# Altium PCB PCB1.PcbDoc
Units mm, origin at the board's own origin, x right, y up, seen from the top; angles counter-clockwise.
Board outline 48.26 x 96.52 mm, 2 copper layers (Top Layer, Bottom Layer), stack 1.569 mm thick; 16 components, 9 nets, 60 pads, 178 vias.
Unrouted connection lines stored in the file: 13.
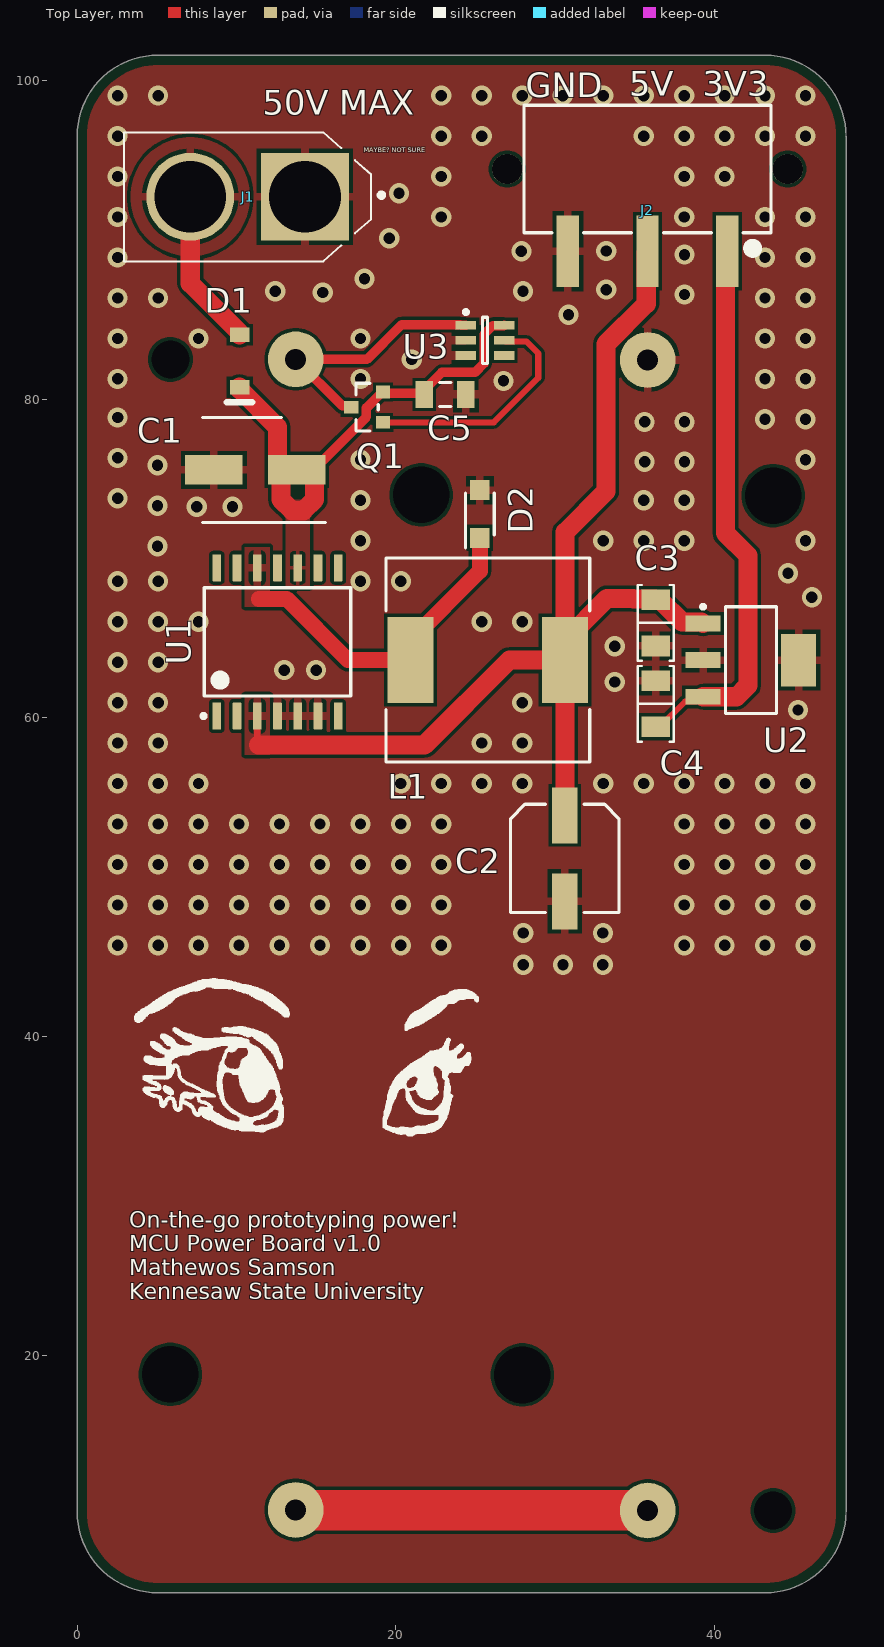
[diagram p0: Top Layer view]
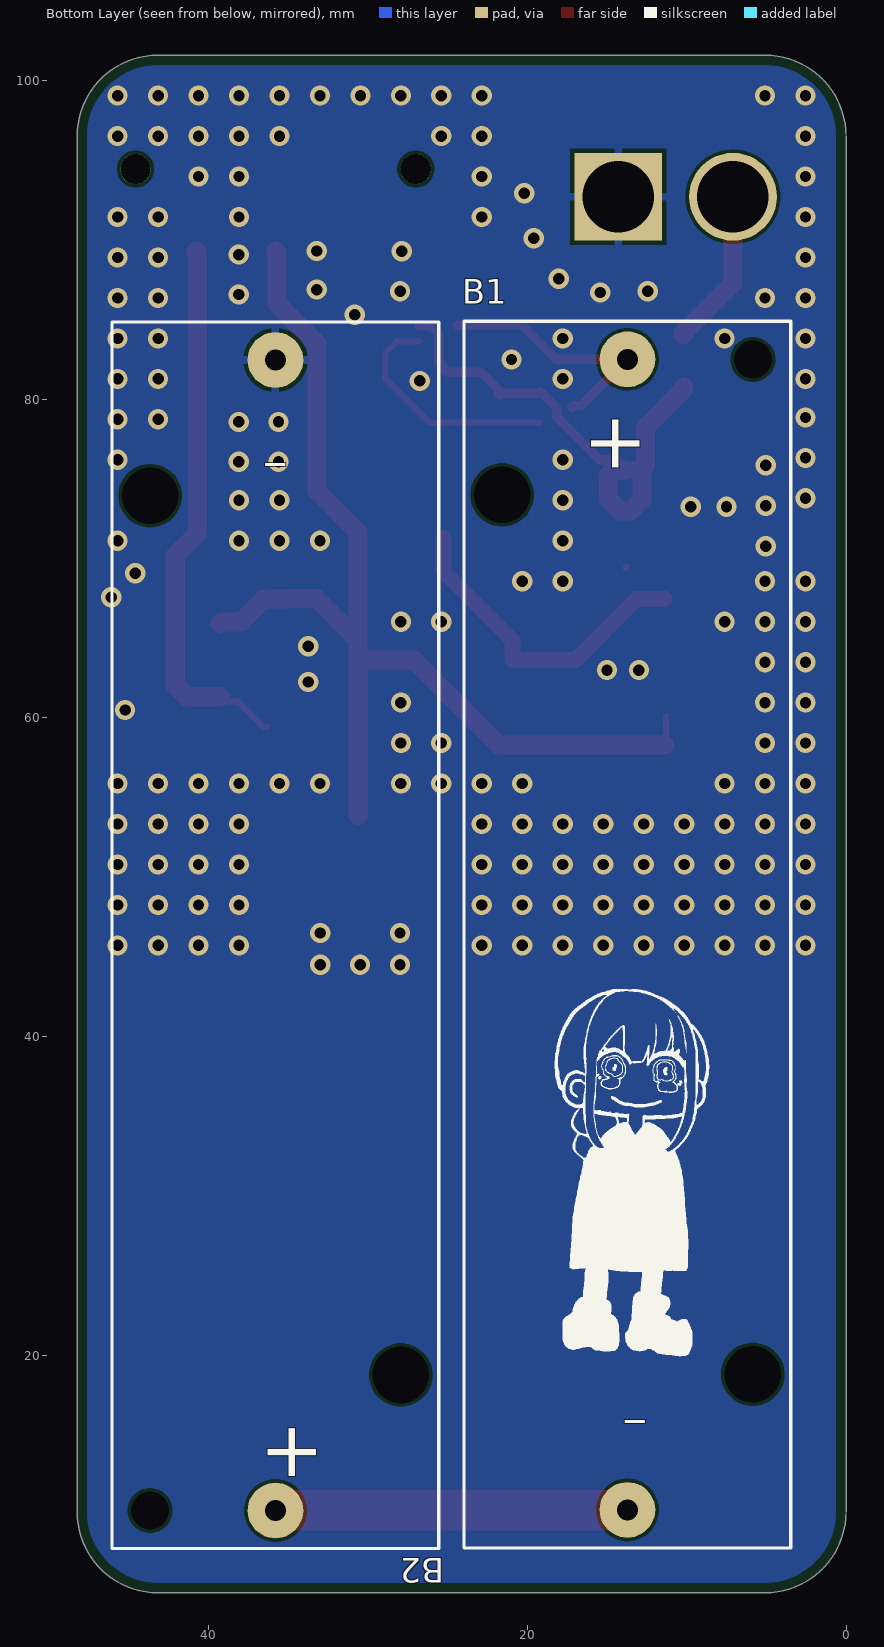
[diagram p1: Bottom Layer view, seen from below]
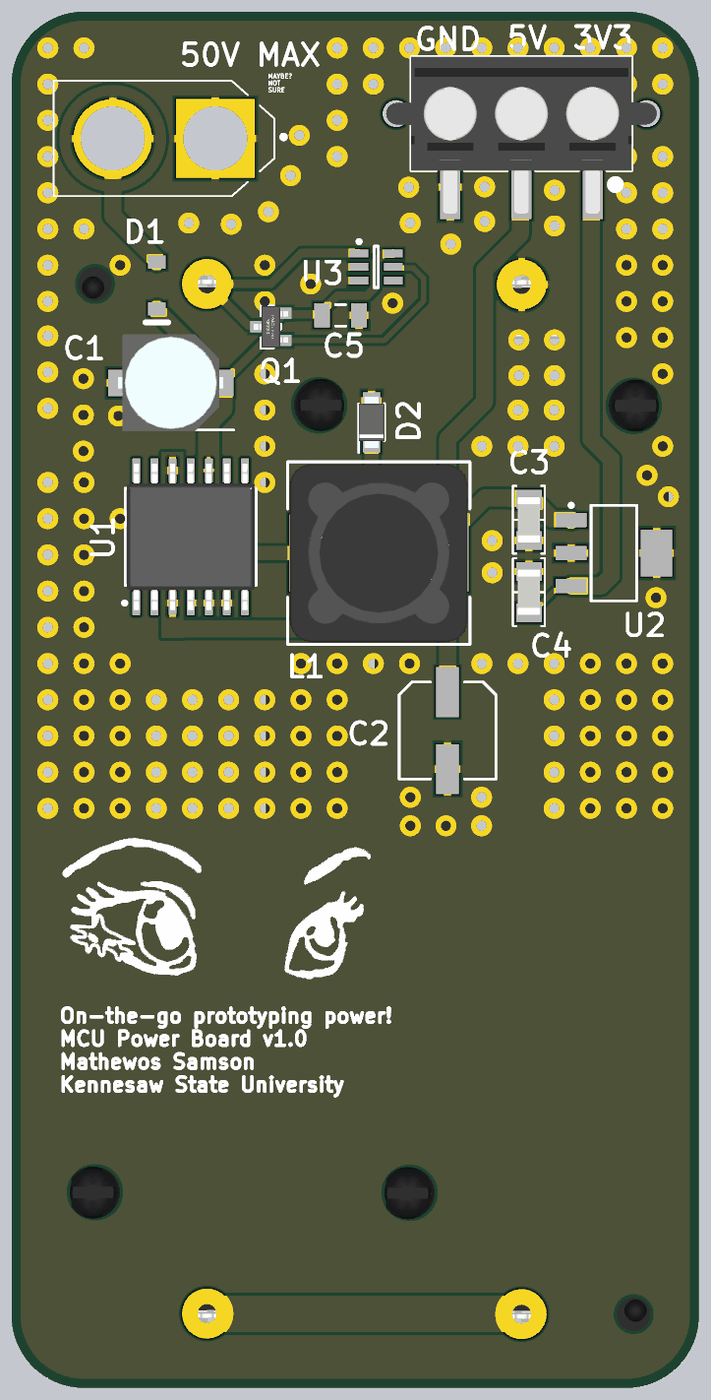
[diagram p2: 3D render of the assembled board from above, using the file's embedded part models]

## Layer stack, top to bottom
Top Solder: solder mask 0.0254, SM-001, Dk 4
Top Layer: signal copper 0.035
Dielectric 1: core 1.4986, Core-043, Dk 4.3
Bottom Layer: signal copper 0.035
Bottom Solder: solder mask 0.0254, SM-001, Dk 4

## Board outline
0,10.16 0,96.52 cw(c5.08,96.52) 5.08,101.6 43.18,101.6 cw(c43.18,96.52) 48.26,96.52 48.26,10.16 cw(c43.18,10.16) 43.18,5.08 5.08,5.08 cw(c5.08,10.16)

## Design rules (kind name [scope] priority, off if disabled: settings)
BoardOutlineClearance [All] p1: gap=0.2 ignorepadtopadclearanceinfootprint=FALSE except(0.4: Arc-SplitBarrior Arc-SplitContinuation Track-SplitBarrior Track-SplitContinuation SMDPad-SplitBarrior SMDPad-SplitContinuation THPad-SplitBarrior THPad-SplitContinuation Via-SplitBarrior Via-SplitContinuation Fill-SplitBarrior Fill-SplitContinuation Poly-SplitBarrior Poly-SplitContinuation Region-SplitBarrior Region-SplitContinuation Text-SplitBarrior Text-SplitContinuation)
Clearance "Clearance Bottom Layer" [OnLayer('Bottom Layer')] p1: gap=0.203 ignorepadtopadclearanceinfootprint=TRUE except(0.254: Arc-Text Track-Text SMDPad-Text THPad-Text Via-Text Fill-Text Poly-Text Region-Text Text-Text)
Clearance "Clearance Top Layer" [OnLayer('Top Layer')] p2: gap=0.203 ignorepadtopadclearanceinfootprint=TRUE except(0.254: Arc-Text Track-Text SMDPad-Text THPad-Text Via-Text Fill-Text Poly-Text Region-Text Text-Text)
Clearance [All] p3: gap=0.2 ignorepadtopadclearanceinfootprint=FALSE except(0.089: Arc-Arc Arc-Track Arc-SMDPad Track-Track Track-SMDPad SMDPad-SMDPad; 0.127: Arc-Via Track-Via SMDPad-Via THPad-Via Via-Via; 0.254: Arc-Text Track-Text SMDPad-Text THPad-Text Via-Text Fill-Text Poly-Text Region-Text Text-Text)
HoleSize [All] p1: absolutevalues=TRUE maxlimit=6.3 minlimit=0.2 maxpercent=80.000 minpercent=20.000
MinimumAnnularRing [All] p1: minimumring=0.076
MinimumSolderMaskSliver [All] p1: minsoldermaskwidth=0.1
PolygonConnect PolygonConnect_3 [All vs IsNamedPolygon('VIN_L01_P001')] p1: connectstyle=Relief reliefconductorwidth=0.254 reliefentries=4 polygonreliefangle="90 Angle" airgapwidth=0.2
PolygonConnect PolygonConnect_2 [All vs IsNamedPolygon('VIN_L01_P001')] p2: thpad.connectstyle=Relief thpad.reliefconductorwidth=0.254 thpad.reliefentries=4 thpad.polygonreliefangle="90 Angle" thpad.airgapwidth=0.254 smdpad.connectstyle=Relief smdpad.reliefconductorwidth=0.1 smdpad.reliefentries=4 smdpad.polygonreliefangle="90 Angle" smdpad.airgapwidth=0.254 via.connectstyle=Relief via.reliefconductorwidth=0.254 via.reliefentries=4 via.polygonreliefangle="90 Angle" via.airgapwidth=0.254
PolygonConnect [All vs IsNamedPolygon('VIN_L01_P001')] p3: connectstyle=Relief reliefconductorwidth=0.254 reliefentries=4 polygonreliefangle="90 Angle" airgapwidth=0.1
PolygonConnect PolygonConnect_1 [All] p4: thpad.connectstyle=Relief thpad.reliefconductorwidth=0.508 thpad.reliefentries=4 thpad.polygonreliefangle="90 Angle" thpad.airgapwidth=0.254 smdpad.connectstyle=Relief smdpad.reliefconductorwidth=0.508 smdpad.reliefentries=4 smdpad.polygonreliefangle="90 Angle" smdpad.airgapwidth=0.254 via.connectstyle=Direct via.reliefconductorwidth=0.508 via.reliefentries=4 via.polygonreliefangle="90 Angle" via.airgapwidth=0.254
RoutingCorners [All] p1: cornerstyle=Round minsetback=2.54 maxsetback=2.54
RoutingVias [All] p1: holewidth=0.5 width=1 viastyle="Through Hole" minholewidth=0.2 minwidth=0.45 maxholewidth=1 maxwidth=2
SilkToSilkClearance [All] p1: silktosilkclearance=0.1
SilkToSolderMaskClearance [IsPad] p1: minsilkscreentomaskgap=0.1 clearancetoexposedcopper=TRUE
SolderMaskExpansion [All] p1: expansion=0.102 istentingtop=FALSE
Width [All] p1: maxlimit=2.54 minlimit=0.089 preferedwidth=0.381
25 further rules are at their usual default settings.

## Components (designator, comment, footprint, x,y, rotation, side; value= is the part's Value field where it differs from the comment)
B1 "1043" "KEYSTONE 1043" 13.72,46.396 r90 bottom locked
B2 "1043" "KEYSTONE 1043" 35.814,46.355 r270 bottom locked
C1 "EMVH500ADA220MF80G" CAPAE660X800N 11.176,75.565 r180 top
C2 "UUD1A221MCL1GS" NIC-CAPA2-6.3X7.7_V 30.607,51.181 r270 top
C3 "4.7µF" "CAP 1206_3216 - 1.8MM" 36.322,65.966 r90 top
C4 "1µF" "CAP 1206_3216 - 1.8MM" 36.322,60.886 r270 top
C5 "C1206C105K5RACTU" CAPC3216X110X50LL20T25 23.1,80.3 r180 top
D1 "B5819W" MCC-SOD123_V 10.2,82.4 r270 top
D2 "DSS16UTR" SODFL3618X110N 25.275,72.8 r90 top
J1 "XT60-M" AMASS_XT60-M 10.699,92.71 r180 top
J2 "691709710303" 691709710303 35.8,94.45 r180 top
L1 "330µH" "BOURNS SRR1280" 25.781,63.627 r0 top
Q1 "DMP2004K-7" FP-SOT23-MFG 18.2,79.5 r180 top
U1 "LM2574HVM-5.0/NOPB" NPA0014B_L 12.573,64.77 r90 top
U2 "MCP1825S-3302E/DB" SOT-223-DB3_N 42.291,63.627 r0 top
U3 "LTC4412ES6#TRMPBF" LT-S6-6-TSOT-23_N 25.6,83.7 r0 top

## Footprints (in the part's own frame and the unit in brackets; to place one, negate y for a bottom-side part, rotate by r counter-clockwise, add the part's x,y. Pads: shape width x height; smd on the part's side, far side on the other; paste and mask are expansions set on the pad)
691709710303 [mm] "Horizontal Entry SMT with Pressure Clamp, pitch 5mm, 03p"
  rect 1.4x4.5 smd: 1(-5,5.15) 2(0,5.15) 3(5,5.15)
  round 1.9 hole 1.9 unplated: M1(-8.8,0) M2(8.8,0)
  silkscreen extent -7.75,-4 7.75,5.17, body extent -9.5,-4 9.5,7, height 9.95
AMASS_XT60-M [mm]
  rect 5.516x5.516 hole 4.5: 1(-3.6,0)
  round 5.516 hole 4.5: 2(3.6,0)
  silkscreen extent -8.55,-4.05 7.75,4.05
"BOURNS SRR1280" [mm] "Precision Wire Wound Inductor, 2-Leads, Body 12.50x12.50mm, IPC Medium Density"
  rect 2.9x5.4 smd: 1(-4.85,0) 2(4.85,0)
  silkscreen extent -6.4,-6.4 6.4,6.4, body extent -6.25,-6.25 6.25,6.25, height 7.9
"CAP 1206_3216 - 1.8MM" [mm] "Chip Capacitor, 2-Leads, Body 3.25x1.60mm, IPC Medium Density"
  rect 1.3x1.8 smd: 1(-1.45,0) 2(1.45,0)
  silkscreen extent -2.37,-1.12 2.37,1.12, body extent -1.6,-0.8 1.6,0.8, height 1.8
CAPAE660X800N [mm]
  rect 3.6x1.85 smd: 1(-2.6,0) 2(2.6,0)
  silkscreen extent -4.4,-3.3 3.3,3.3, body extent -3.7,-3.4 3.7,3.4, height 8
CAPC3216X110X50LL20T25 [mm] "Chip Capacitor, 2-Leads, Body 3.20x1.60mm, IPC High Density"
  rect 1.1x1.7 smd: 1(-1.3,0) 2(1.3,0)
  silkscreen extent -0.35,-0.75 0.35,0.75, body extent -1.7,-0.9 1.7,0.9, height 1.1
FP-SOT23-MFG [mm]
  rect 0.9x0.8 smd paste+0 mask+0: 1(-1,0.95) 2(-1,-0.95) 3(1,0)
  silkscreen extent -0.7,-1.5 0.7,1.5, body extent -1.55,-1.6 1.55,1.6, height 0.25
"KEYSTONE 1043" [mm]
  round 3.5 hole 1.32: 1(36.11,0) 2(-36.11,0)
  rect 0x0 hole 3.55 unplated: M(-27.6,-7.87) M(27.6,7.87)
  rect 0x0 hole 2.39 unplated: M(36.11,-7.87)
  silkscreen extent -38.5,-10.25 38.5,10.25, body extent -38.53,-10.32 38.53,10.33, height 14.86
LT-S6-6-TSOT-23_N [mm] "SOT23, 6-Leads, Body 2.9x1.75mm, Pitch 0.95mm, IPC Medium Density"
  rect 1.3x0.55 smd: 1(-1.2,0.95) 2(-1.2,0) 3(-1.2,-0.95) 4(1.2,-0.95) 5(1.2,0) 6(1.2,0.95)
  silkscreen extent -1.32,-1.45 0.15,1.9, body extent -0.87,-1.45 0.87,1.45, height 1
MCC-SOD123_V [mil] "SOD123, 2-Leads, Body 2.7x1.6mm, Height 1.35mm"
  rect 35.98x47.99 smd: 1(-64.5,0) 2(64.5,0)
  silkscreen extent 102,-31 102,31, body extent -53,-31 53,31, height 53
NIC-CAPA2-6.3X7.7_V [mm] "Aluminum Electrolytic Capacitor, Diameter 6.3mm, Height 8mm, Pitch 5.4mm"
  rect 3.5x1.6 smd: 1(-2.7,0) 2(2.7,0)
  silkscreen extent -3.4,-3.4 3.4,3.4, body extent -3.14,-3.12 3.14,3.15, height 8
NPA0014B_L [mm] "SOIC, 14-Leads, Body 9.2x7.6mm, Pitch 1.27mm, IPC High Density"
  rrect18% 1.7x0.55 smd: 1(-4.65,3.81) 2(-4.65,2.54) 3(-4.65,1.27) 4(-4.65,0) 5(-4.65,-1.27) 6(-4.65,-2.54) 7(-4.65,-3.81) 8(4.65,-3.81) 9(4.65,-2.54) 10(4.65,-1.27) 11(4.65,0) 12(4.65,1.27) 13(4.65,2.54) 14(4.65,3.81)
  silkscreen extent -4.77,-4.6 3.4,4.76, body extent -5.14,-4.5 5.14,4.5, height 2.44
SODFL3618X110N [mm]
  rect 1.24x1.22 smd: 1(-1.5,0) 2(1.5,0)
  silkscreen extent -2.12,-0.9 1.3,0.9, body extent -1.8,-0.9 1.8,0.9, height 1.1
SOT-223-DB3_N [mm] "SOT223, 4-Leads, Body 6.5x3.5mm, Pitch 2.3mm, Lead Span 7mm, IPC Medium Density"
  rect 2.2x1 smd: 1(-3,2.3) 2(-3,0) 3(-3,-2.3)
  rect 2.2x3.3 smd: 4(3,0)
  silkscreen extent -3.12,-3.35 1.6,3.47, body extent -1.85,-3.35 1.85,3.35, height 1.8

## Part data
B1 B2: "BATTERY HOLDER 18650 PC PIN", Manufacturer="Keystone Electronics", Operating Temperature="-50°C ~ 145°C", Supplier Part Number 1=36-1043-ND, Battery Cell Size=18650, Battery Type, Function="Cylindrical, Holder", ComponentLink1Description=Datasheet, ComponentLink1URL=http://keyelco.com/userAssets/file/M65p27.pdf, ComponentLink2Description="DigiKey Link", ComponentLink2URL=http://digikey.com/product-detail/en/keystone-electronics/1043/36-1043-ND/2745669, Height Above Board="0.585\" (14.86mm)", LastUpdated="2/2/2020 9:19:56 AM", Lifecycle Status=Active, Minimum Order=1, Mounting Type="PCB, Through Hole", Number of Cells=1, Packaging=Unknown, Part Number=1043, Part Status=Active, PartId=2, Price=2.58, Series=-, Style="Holder (Open)", Supplier 1=DigiKey, Termination Style="PC Pin"
C1: "Capacitor Polarised", Manufacturer_Name="United Chemi-Con", Mouser Part Number=661-MVH50V220M, Arrow Part Number=EMVH500ADA220MF80G, Arrow Price/Stock=https://www.arrow.com/en/products/emvh500ada220mf80g/united-chemi-con, Datasheet Link=https://eu.mouser.com/datasheet/2/420/MVHRA_e-2509159.pdf, Height=8mm, Manufacturer_Part_Number=EMVH500ADA220MF80G, Mouser Price/Stock=https://www.mouser.co.uk/ProductDetail/United-Chemi-Con/EMVH500ADA220MF80G?qs=P6%252BCbgEIsoMIfZ3czqY2Bw%3D%3D
C2: library part CMP-0687-00055-1, "Aluminum Electrolytic Capacitor, UD Series, Low Impedance, 220 uF, 10 V, + / - 20%, -55 to 105 degC, Chip Type, 6.3 x 7.7 mm D x L, Pb-Free, Reel", Manufacturer=Nichicon, Rated Capacitance="220 uF", Rated Ripple Current (at 100kHz)="280 mA", Rated Voltage="10 V", Tolerance Rated Capacitance="-20 to 20%", ComponentLink1Description="Manufacturer URL", ComponentLink1URL=http://www.nichicon.co.jp/, ComponentLink2Description=Datasheet, ComponentLink2URL=http://products.nichicon.co.jp/en/pdf/XJA043/e-ud.pdf, ComponentLink3Description="Package Specification", ComponentLink3URL=http://products.nichicon.co.jp/en/pdf/XJA043/e-ud.pdf, DatasheetVersion=08/2012, Diameter="6.3 mm", Endurance Time="2000 h", Impedance="0.34 Ohm", Length="7.7 mm", Mounting Technology="Surface Mount", PackageDescription="2-Pin Surface Mount Device, Diameter 6.3 mm, Height 7.7 mm, Pitch 5.4 mm", PackageReference=CAPAE-D6.3H7.7, Packing="Dia382mm Reel", PartNumber=UUD1A221MCL1GS, RoHS=TRUE
C3: library part CM316X5R475K25AT, "CAP CER 4.7UF 25V X5R 1206", Device Package="1206 (3216 Metric)", Manufacturer="Kyocera International Inc. Electronic Components", Operating Temperature="-55°C ~ 85°C", Supplier Part Number 1=1253-2080-1-ND, Temperature Coefficient=X5R, Tolerance=±10%, Voltage - Rated=25V, Applications="General Purpose", Capacitance=4.7µF, ComponentLink1Description=Datasheet, ComponentLink1URL=https://global.kyocera.com/prdct/electro/product/pdf/cm_e.pdf, ComponentLink2Description="DigiKey Link", ComponentLink2URL=http://digikey.com/product-detail/en/kyocera-international-inc-electronic-components/CM316X5R475K25AT/1253-2080-1-ND/10197176, LastUpdated="9/2/2020 1:05:31 AM", Lifecycle Status=Active, Minimum Order=1, Mounting Type="Surface Mount, MLCC", Package / Case="1206 (3216 Metric)", Packaging=TapeAndReel, Part Number=CM316X5R475K25AT, Part Status=Active, PartId=21915, Price=0.09, Series=CM, Size / Dimension="0.126\" L x 0.063\" W (3.20mm x 1.60mm)", Supplier 1=DigiKey, Thickness (Max)="0.069\" (1.75mm)"
C4: library part CM316X5R475K25AT, "CAP CER 4.7UF 25V X5R 1206", Capacitance=4.7µF, Device Package="1206 (3216 Metric)", Manufacturer="Kyocera International Inc. Electronic Components", Operating Temperature="-55°C ~ 85°C", Supplier Part Number 1=1253-2080-1-ND, Temperature Coefficient=X5R, Tolerance=±10%, Voltage - Rated=25V, Applications="General Purpose", ComponentLink1Description=Datasheet, ComponentLink1URL=https://global.kyocera.com/prdct/electro/product/pdf/cm_e.pdf, ComponentLink2Description="DigiKey Link", ComponentLink2URL=http://digikey.com/product-detail/en/kyocera-international-inc-electronic-components/CM316X5R475K25AT/1253-2080-1-ND/10197176, LastUpdated="9/2/2020 1:05:31 AM", Lifecycle Status=Active, Minimum Order=1, Mounting Type="Surface Mount, MLCC", Package / Case="1206 (3216 Metric)", Packaging=TapeAndReel, Part Number=CM316X5R475K25AT, Part Status=Active, PartId=21915, Price=0.09, Series=CM, Size / Dimension="0.126\" L x 0.063\" W (3.20mm x 1.60mm)", Supplier 1=DigiKey, Thickness (Max)="0.069\" (1.75mm)"
C5: library part CMP-2000-06011-1, "Chip Capacitor, 1 uF, +/- 10%, 50 V, -55 to 125 degC, 1206 (3216 Metric), RoHS, Tape and Reel", Capacitance=1uF, Capacitance - nF=1000nF, Case Code - in=1206, Case Code - mm=3216, Case Height=1mm, Case Length=3.2mm, Case Width=1.6mm, Dielectric=X7R, Manufacturer=Kemet, Maximum Operating Temperature=+125C, Minimum Operating Temperature=-55C, Operating Temperature Range=-55Cto+125C, Package / Case=1206(3216metric), Package Description="2-Pin Surface Mount Device, Body 3.2 x 1.6 mm", Temperature Coefficient / Code=+/-15%, Tolerance=10%, Voltage Rating=50V, Brand=Kemet, Class=Class1, Datasheet URL=http://www.kemet.com/docfinder?Partnumber=C1206C105K5RACTU, Datasheet Version=02/2016, Dimensions=1.6mmWx3.2mmLx1mmH, Factory Pack Quantity=2500, Manufacturer URL=http://www.kemet.com/, Mounting Technology=SurfaceMount, Package Reference=1206, Packaging=Reel, Product=GeneralTypeMLCCs, Product Category=MultilayerCeramicCapacitorsMLCC-SMD/SMT, RoHS=Details, Series=C1206C, Termination Style=SMD/SMT, Type=SMDMLCCX7R6.3-250VDCCommericalGrade, Voltage Rating DC=50V
D1: library part CMP-004-00005-2, "Schottky Barrier Rectifier, 40 V, 1 A, -65 to 125 degC, 2-Pin SOD123, RoHS, Tape and Reel", Case/Package=SOD123, Manufacturer="Micro Commercial Components", Package Description="2-Pin Small Outline Diode, Body 2.7 x 1.6 mm, Height 1.35 mm", Datasheet URL=http://www.mccsemi.com/up_pdf/B5817W-B5819W(SOD-123).pdf, Datasheet Version="Rev. B, 01/2013", Manufacturer URL=http://www.mccsemi.com/, Mounting Technology=SM, Package Reference=SOD123, Package URL=http://www.mccsemi.com/up_pdf/1N4448W(SOD-123).pdf, RoHS Compliant=Unknown
D2: "Schottky Diode", Manufacturer_Name="SMC Diode Solutions", Datasheet Link=http://www.smc-diodes.com/propdf/DSS12U%20THRU%20DSS125U%20N1873%20REV.A.pdf, Height=1.1mm, Manufacturer_Part_Number=DSS16UTR
J1: "Plug; DC supply; XT60; male; PIN: 2; for cable; soldered; 30A; 500V", Package="Package Analog Devices", Availability=Unavailable, MF=AMASS, MP=XT60-M, Price=None, SnapEDA_Link=https://www.snapeda.com/parts/XT60-M/AMASS/view-part/2883912/?ref=snap
J2: library part CMP-1502-03336-1, "Serie 7097 - 5.00 mm Horizontal Entry SMT with Pressure Clamp WR-TBL, 3 pin", Manufacturer="Wurth Elektronik", Operating Temperature=-45to130degC, Datasheet URL=http://katalog.we-online.de/em/datasheet/6917097103xx.pdf, Manufacturer URL=http://www.we-online.de, Mounting Technology=SMT, Package Reference=691709710303, Packaging=TapeandReelwithCap, Part Number=691709710303, Pin Number=3, Pitch=5.00mm, Publisher=WurthElektronik
L1: library part SRR1280-331K, "FIXED IND 330UH 1.1A 600MOHM SMD", Current - Saturation=1.4A, Current Rating (Amps)=1.1A, DC Resistance (DCR)="600mOhm Max", Device Package=Nonstandard, Frequency - Self Resonant=2.9MHz, Inductance Frequency - Test=100kHz, Manufacturer="Bourns Inc.", Operating Temperature="-40°C ~ 125°C", Q @ Freq="18 @ 796kHz", Supplier Part Number 1=SRR1280-331KLCT-ND, Tolerance=±10%, ComponentLink1Description=Datasheet, ComponentLink1URL=https://www.bourns.com/docs/Product-Datasheets/SRR1280.pdf, ComponentLink2Description="DigiKey Link", ComponentLink2URL=http://digikey.com/product-detail/en/bourns-inc/SRR1280-331K/SRR1280-331KLCT-ND/2127441, Height - Seated (Max)="0.315\" (8.00mm)", Inductance=330µH, LastUpdated="9/2/2020 1:22:09 AM", Lifecycle Status=Active, Material - Core=Ferrite, Minimum Order=1, Mounting Type="Surface Mount", Package / Case=Nonstandard, Packaging=TapeAndReel, Part Number=SRR1280-331K, Part Status=Active, PartId=35, Price=0.65, Series=SRR1280, Shielding=Shielded, Size / Dimension="0.492\" L x 0.492\" W (12.50mm x 12.50mm)", Supplier 1=DigiKey, Type=Wirewound
Q1: library part CMP-12801-000029-1, "MOSFET P-CH 20V 600MA SOT23-3", Continuous Drain Current=-600mA, Drain To Source Breakdown Voltage=-20V, Drain To Source Resistance=1.1Ω, Gate To Source Voltage=8V, Input Capacitace At Vds="175pF @ -16V", Manufacturer="Diodes Inc.", Max Forward Diode Voltage=-1.2V, Max Junction Temp=+150°C, Package=SOT23, Power Dissipation=550mW, Pulse Drain Current=-1.9A, Temperature="-55°C to +150°C", Temperature Range Low=-55°C, Automotive=No, Category=Trans, ComponentLink2Description=Datasheet, ComponentLink2URL=https://www.diodes.com/assets/Datasheets/ds30933.pdf, Depletion Mode=False, Device Class L1="Discrete Semiconductors", Device Class L2=Transistors, Device Class L3=MOSFETs, Digikey Description="MOSFET P-CH 20V 600MA SOT23-3", Drain To Source Voltage=-20V, Footprint Url=https://www.diodes.com/assets/Package-Files/SOT23.pdf, Height=1.1mm, Lead Free=Yes, Manufacturer Part Number=DMP2004K-7, Mouser Description="MOSFET P-Channel", Number Of Channels=1, Number Of P Channels=1, Octopart=https://octopart.com/dmp2004k-7-diodes+inc.-7151877, RoHS=TRUE, Rthja Max=227°C/W, Standoff Height=0.013mm, Temperature Range High=+150°C, Threshold Vgs Max=-1V, Threshold Vgs Min=-0.5V, Turn Off Delay Time=20.2ns, Turn On Delay Time=8.5ns
U1: library part CMP-0069-00789-3, "SIMPLE SWITCHER® 0.5A Step-Down Voltage Regulator, 14-pin Wide SOIC, Pb-Free", Manufacturer="Texas Instruments", PackageTopMarking="NSUZXYTTE#*LM2574HVM*-5.0 P+", PowerWise=N, Code_IPC=SOIC127P1030-14, Code_JEDEC=MS-013-AF, ComponentLink1Description="Datasheet URL", ComponentLink1URL=http://www.ti.com/general/docs/lit/getliterature.tsp?genericPartNumber=LM2574HV&fileType=pdf, CompType=Switcher, PackageDescription="Molded Package, S.O., .300in Wide, 14 Lead", PackageReference=NPA0014B, PinCount=14, RoHS=Y
U2: library part CMP-0136-00458-1, "500 mA, Low Voltage, Low Quiescent Current LDO Regulator, 3-Pin SOT-223, Extended Temperature", DatasheetVersion="revB, Feb-2008", PackageDescription="3-Lead Plastic Small Outline Transistor (DB) [SOT-223]", PackageReference=SOT-223-DB3, PackageVersion="revBB, Aug-2009"
U3: library part CMP-0479-00425-1, "Low Loss PowerPath(TM) Controller, 2.5 to 28 V Vin, 6-pin SOT23 (S6-6), -40 to 85 degC, Pb-Free, Mini Tape and Reel", Manufacturer="Linear Technology", Code_JEDEC=MO-193, ComponentLink1Description="Manufacturer URL", ComponentLink1URL=http://www.linear.com/, ComponentLink2Description=Datasheet, ComponentLink2URL=http://cds.linear.com/docs/en/datasheet/4412fa.pdf, ComponentLink3Description="Package Specification", ComponentLink3URL=http://cds.linear.com/docs/en/packaging/SOT_6_05-08-1636.pdf, Ideal Diode="Single, External, P-Channel", Mounting Technology="Surface Mount", PackageDescription="6-Pin Plastic TSOT-23, Body 2.9 x 1.63 mm, Pitch 0.95 mm", PackageReference=S6-6, PackageVersion=Jun-10, Packing="Mini Tape and Reel", PartNumber=LTC4412ES6#TRMPBF, RoHS=TRUE

## Via types
v1: diameter 1.27, hole 0.711, Top Layer to Bottom Layer, 178 vias

## Nets (pads, with @x,y where several pads share a name; then routed paths per layer and width w, separated by ;. In a path a pad name is that pad's centre, name@x,y a point inside that pad or via, vN(x,y) a via of type N, cw(c..) or ccw(c..) an arc to the next point about the centre after c; other vN are vias at no path point)
+2S: B1.1 Q1.3 U3.1 | length 16.3
  Top Layer w0.6: Q1.3 17.1,79.6 16.626,79.6 B1.1 18.19,82.506 20.362,84.678 24.047,84.678 24.075,84.65 U3.1
+3V3: C4.2 J2.1 U2.3 | length 34.7
  Top Layer w0.381: C4.2 36.572,59.436 38.153,61.017 38.981,61.017 U2.3
  Top Layer w1.2: U2.3 41.397,61.327 42.1,62.03 42.1,70.2 40.7,71.6 40.7,89.2 J2.1
+5V: C2.1 C3.2 J2.2 L1.2 U1.3 U2.1 | length 71.3
  Top Layer w0.381: U1.3 11.303,58.397 11.4,58.3
  Top Layer w1.2: 11.4,58.3 21.8,58.3 27.127,63.627 L1.2 ; C2.1 30.619,53.893 30.619,63.615 L1.2 ; J2.2 35.719,89.219 35.719,85.988 33.2,83.469 33.2,74.223 30.631,71.654 L1.2@30.631,64.877 ; U2.1 39.191,66.027 37.961,66.027 36.572,67.416 C3.2 36.272,67.466 34.934,67.466 34.9,67.5 33.254,67.5 L1.2@30.631,64.877 ; L1.2 L1.2@30.631,64.877
GATE: Q1.1 U3.5 | length 14.9
  Top Layer w0.381: Q1.1 26.15,78.55 28.942,81.342 28.942,82.883 28.21,83.615 26.885,83.615 U3.5
GND: B2.2 C1.2 C2.2 C3.1 C4.1 C5.1 D2.2 J1.1 J2.3 U1.4 U1.5 U1.6 U2.2 U2.4 U3.2 U3.3
  other v1: 28,44.5 30.5,44.5 33,44.5 2.54,45.72 5.08,45.72 7.62,45.72 10.16,45.72 12.7,45.72 15.24,45.72 17.78,45.72 20.32,45.72 22.86,45.72 38.1,45.72 40.64,45.72 43.18,45.72 45.72,45.72 28,46.5 33,46.5 2.54,48.26 5.08,48.26 7.62,48.26 10.16,48.26 12.7,48.26 15.24,48.26 17.78,48.26 20.32,48.26 22.86,48.26 38.1,48.26 40.64,48.26 43.18,48.26 45.72,48.26 2.54,50.8 5.08,50.8 7.62,50.8 10.16,50.8 12.7,50.8 15.24,50.8 17.78,50.8 20.32,50.8 22.86,50.8 38.1,50.8 40.64,50.8 43.18,50.8 45.72,50.8 2.54,53.34 5.08,53.34 7.62,53.34 10.16,53.34 12.7,53.34 15.24,53.34 17.78,53.34 20.32,53.34 22.86,53.34 38.1,53.34 40.64,53.34 43.18,53.34 45.72,53.34 2.54,55.88 5.08,55.88 7.62,55.88 20.32,55.88 22.86,55.88 25.4,55.88 27.94,55.88 33.02,55.88 35.56,55.88 38.1,55.88 40.64,55.88 43.18,55.88 45.72,55.88 2.54,58.42 5.08,58.42 25.4,58.42 27.94,58.42 45.25,60.5 2.54,60.96 5.08,60.96 27.94,60.96 33.75,62.25 13,63 15,63 2.54,63.5 5.08,63.5 33.75,64.5 2.54,66.04 5.08,66.04 7.62,66.04 25.4,66.04 27.94,66.04 46.12,67.58 2.54,68.58 5.08,68.58 17.78,68.58 20.32,68.58 44.62,69.08 5.04,70.78 17.78,71.12 33.02,71.12 35.56,71.12 38.1,71.12 45.72,71.12 7.5,73.25 9.75,73.25 5.04,73.32 17.78,73.66 35.56,73.66 38.1,73.66 2.54,73.78 5.04,75.86 35.62,76.08 38.12,76.08 17.78,76.2 45.72,76.2 2.54,76.32 35.62,78.58 38.12,78.58 43.18,78.74 45.72,78.74 2.54,78.86 26.756,81.154 2.54,81.28 17.78,81.28 43.18,81.28 45.72,81.28 21,82.5 2.54,83.82 7.62,83.82 17.78,83.82 43.18,83.82 45.72,83.82 30.841,85.298 2.54,86.36 5.08,86.36 43.18,86.36 45.72,86.36 38.12,86.58 15.421,86.698 12.437,86.777 27.99,86.777 33.218,86.883 18.035,87.569 2.54,88.9 43.18,88.9 45.72,88.9 38.12,89.08 27.884,89.285 33.218,89.312 19.593,90.104 2.54,91.44 22.86,91.44 38.1,91.44 43.18,91.44 45.72,91.44 20.2,92.929 2.54,93.98 22.86,93.98 38.1,93.98 40.64,93.98 2.54,96.52 22.86,96.52 25.4,96.52 35.56,96.52 38.1,96.52 40.64,96.52 43.18,96.52 45.72,96.52 2.54,99.06 5.08,99.06 22.86,99.06 25.4,99.06 27.94,99.06 30.48,99.06 33.02,99.06 35.56,99.06 38.1,99.06 40.64,99.06 43.18,99.06 45.72,99.06
NetB1_2: B1.2 B2.1 | length 22.1
  Top Layer w2.54: B1.2 13.74,10.266 35.793,10.266 B2.1
NetD1_1: D1.1 J1.2 | length 10
  Top Layer w1.2: J1.2 7.099,87.273 10.2,84.172 D1.1
NetD2_1: D2.1 L1.1 U1.12 | length 20.6
  Top Layer w0.381: D2.1@25.275,71.29 D2.1
  Top Layer w1: 11.4,67.475 13.15,67.475 16.998,63.627 L1.1 20.931,64.877 25.275,69.221 D2.1@25.275,71.29
VIN: C1.1 C5.2 D1.2 Q1.2 U1.10 U3.6 | length 32.6
  Top Layer w0.4: U1.10@13.775,69.488 U1.10
  Top Layer w0.6: C1.1 14.401,76.19 15.452,76.19 18.153,78.892 18.153,79.453 19.15,80.45 Q1.2 19.275,80.375 21.725,80.375 C5.2 21.8,80.6 22.886,81.686 24.973,81.686 25.553,82.267 25.553,84.09 26.088,84.625 26.775,84.625 U3.6
  Top Layer w1.2: D1.2 10.2,80.628 12.576,78.252 12.576,75.89 12.901,75.565 13.125,75.565 12.8,75.24 12.8,73.703 13.503,73 14.197,73 14.9,73.703 14.9,75.24 14.575,75.565 C1.1
pads on no net: B1.M B2.M J2.M1 J2.M2 U1.1 U1.2 U1.7 U1.8 U1.9 U1.11 U1.13 U1.14 U3.4

## Polygon pours and split planes (outlines as drawn)
GND on Top Layer "GND_L01_P008" (solid, pour order 8): 0.635,10.16 0.635,96.52 cw(c5.08,96.52) 5.08,100.965 43.18,100.965 cw(c43.18,96.52) 47.625,96.52 47.625,10.16 cw(c43.18,10.16) 43.18,5.715 5.08,5.715 cw(c5.08,10.16)
+5V on Top Layer "+5V_L01_P004" (solid, pour order 4): 12.075,61.425 10.525,61.425 10.525,57.675 12.075,57.675
NetD1_1 on Top Layer "NETD1_1_L01_P003" (solid, pour order 3): 7.099,88.961 cw(c7.099,92.71) 3.35,92.71 cw(c7.099,92.71) 7.099,96.459 cw(c7.099,92.71) 10.848,92.71 cw(c7.099,92.71)
NetD2_1 on Top Layer "NETD2_1_L01_P002" (solid, pour order 2): 12.075,70.725 10.525,70.725 10.525,66.975 12.075,66.975
VIN on Top Layer "VIN_L01_P001" (solid, pour order 1): 13.1,68.2 14.6,68.2 14.6,73.7 13.1,73.7
GND on Bottom Layer "GND_L02_P009" (solid, pour order 9): 0.635,10.16 0.635,96.52 cw(c5.08,96.52) 5.08,100.965 43.18,100.965 cw(c43.18,96.52) 47.625,96.52 47.625,10.16 cw(c43.18,10.16) 43.18,5.715 5.08,5.715 cw(c5.08,10.16)

## Silkscreen, mask and mechanical layers (free items; w line width, h text height)
Top Overlay:
  drawing of 8 lines, arcs and shapes, not listed
  text "5V" at 34.654,99.054 h1.52
  text "3V3" at 39.254,99.054 h1.52
  text "GND" at 28.154,98.954 h1.52
  text "50V MAX" at 11.654,97.854 h1.52
  text "MAYBE? NOT SURE" at 18,95.5 h0.3
  text "On-the-go prototyping power! / MCU Power Board v1.0 / Mathewos Samson / Kennesaw State University" at 3.275,23.508 h1
Bottom Overlay:
  drawing of 19 lines, arcs and shapes, not listed
Mechanical 1:
  lines w0.254: 0.635,10.16 ccw(c5.08,10.16) 5.08,5.715 43.18,5.715 ccw(c43.18,10.16) 47.625,10.16 47.625,96.52 ccw(c43.18,96.52) 43.18,100.965 5.08,100.965 ccw(c5.08,96.52) 0.635,96.52 0.635,10.16

## Text inside footprints (layer, text, board x,y; h text height)
B1: Bottom Overlay "-" at 14.1,13.45 h6; Bottom Overlay "+" at 11.8,75.2 h6 r270
B2: Bottom Overlay "+" at 37.45,15.9 h6 r90; Bottom Overlay "-" at 34.95,78.25 h6 r180